# Altium PCB UltraZohm_Digital_Template.PcbDoc
Units mm, origin at the board's own origin, x right, y up, seen from the top; angles counter-clockwise.
Board outline 155.99 x 100 mm, 4 copper layers (Top Layer, Layer 1, Layer 2, Bottom Layer), stack 0.98 mm thick; 9 components, 52 nets, 104 pads, 0 vias.
Unrouted connection lines stored in the file: 165.
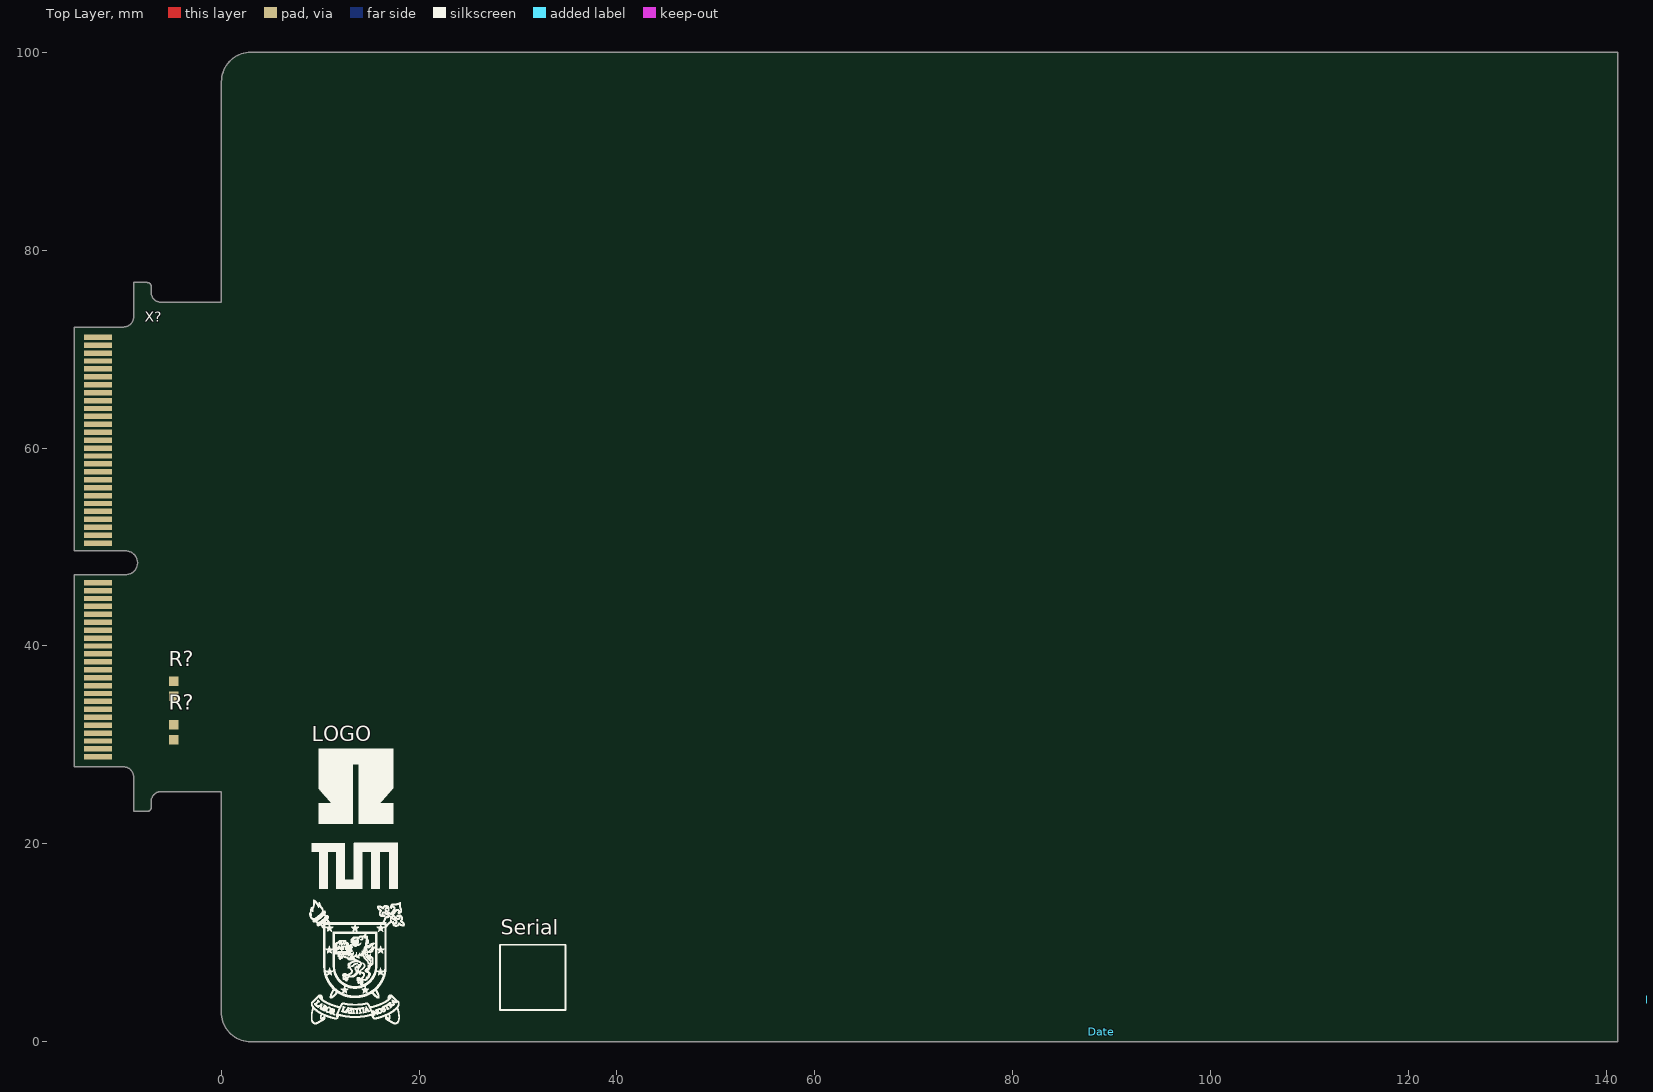
[diagram p0: Top Layer view]
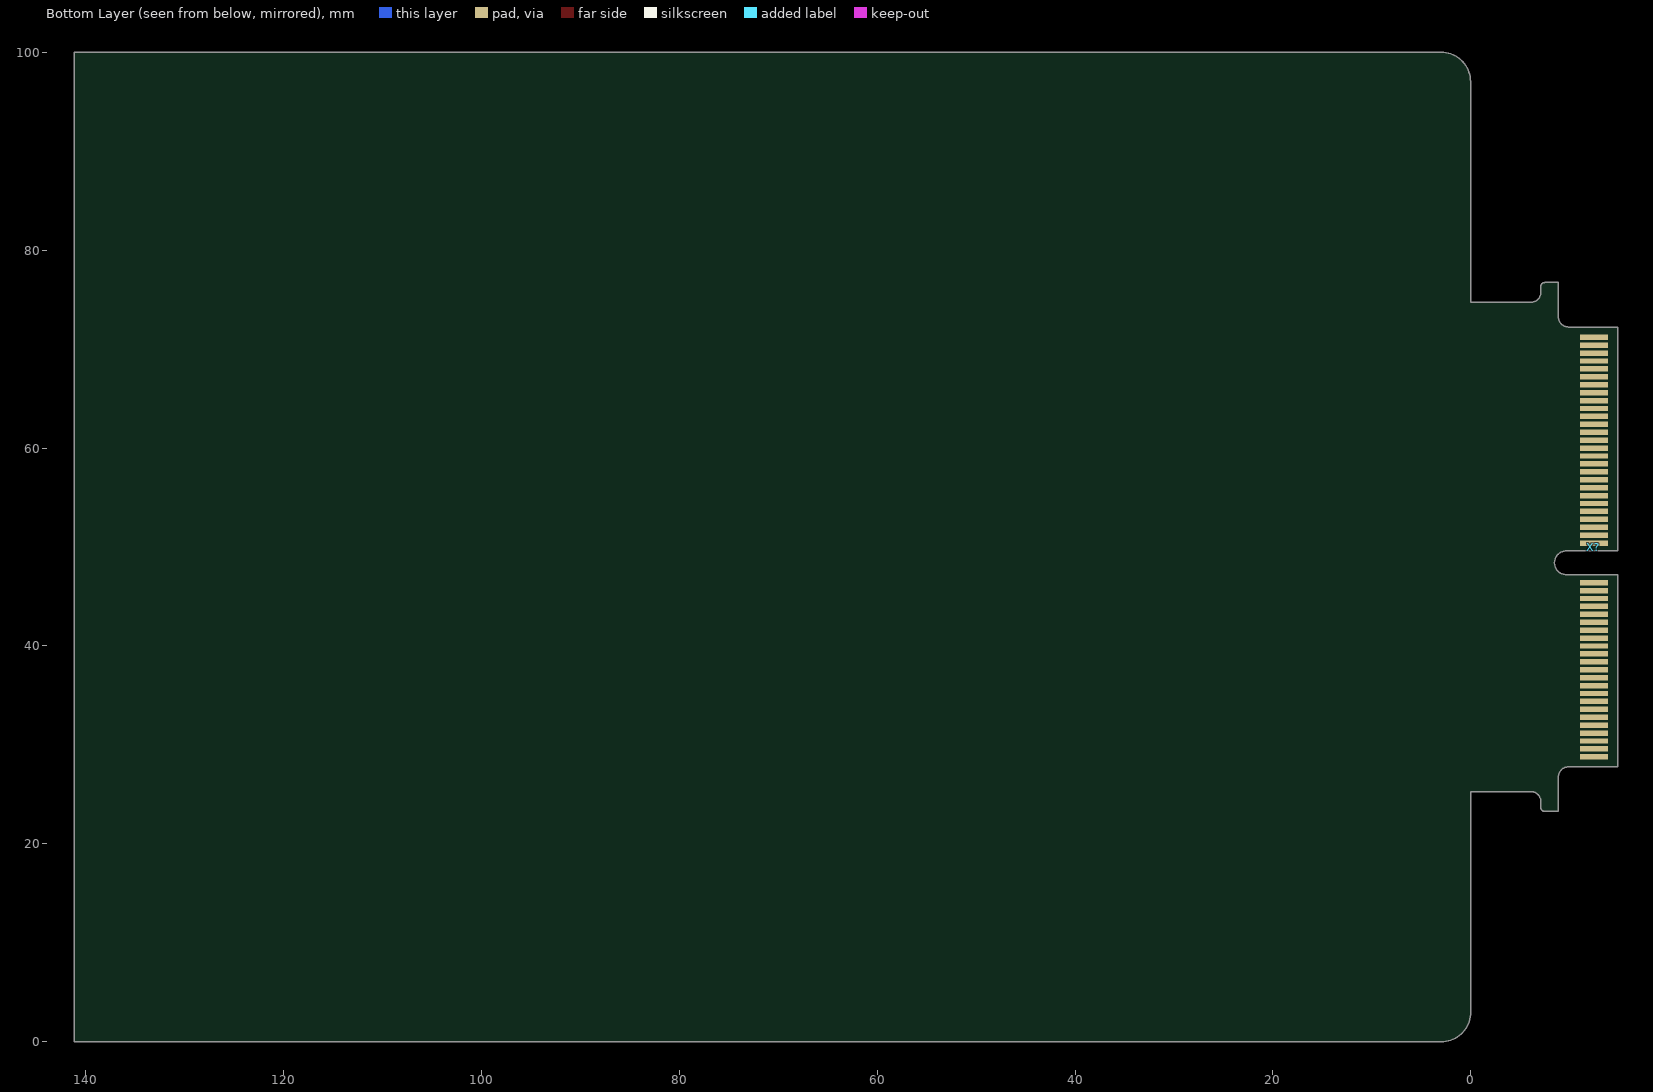
[diagram p1: Bottom Layer view, seen from below]

## Layer stack, top to bottom
Top Solder: solder mask 0.0102, Solder Resist, Dk 3.5
Top Layer: signal copper 0.035
Dielectric 2: prepreg 0.115, FR-4, Dk 4.4
Dielectric 4: prepreg 0.115, FR-4, Dk 4.4
Layer 1: signal copper 0.035
Dielectric 1: core 0.38, Core-036, Dk 4.4
Layer 2: signal copper 0.035
Dielectric 5: prepreg 0.115, FR-4, Dk 4.4
Dielectric 3: prepreg 0.115, FR-4, Dk 4.4
Bottom Layer: signal copper 0.035
Bottom Solder: solder mask 0.0102, Solder Resist, Dk 3.5

## Board outline
-14.853,27.775 -9.853,27.775 cw(c-9.853,26.775) -8.853,26.775 -8.853,23.275 -7.473,23.275 ccw(c-7.473,23.675) -7.073,23.675 -7.073,24.275 cw(c-6.073,24.275) -6.073,25.275 0,25.275 0,3 ccw(c3,3) 3,0 141.141,0 141.141,100 2.99,99.99 ccw(c2.99,97.032) 0.031,97.031 0.031,74.725 -6.073,74.725 cw(c-6.073,75.725) -7.073,75.725 -7.073,76.325 ccw(c-7.473,76.325) -7.473,76.725 -8.853,76.725 -8.853,73.225 cw(c-9.853,73.225) -9.853,72.225 -14.853,72.225 -14.853,49.6 -9.653,49.6 cw(c-9.653,48.4) -9.653,47.2 -14.853,47.2

## Design rules (kind name [scope] priority, off if disabled: settings)
AssemblyTestPointUsage [InNetClass('3V3_SingleEnded') or InNetClass('5V_SingleEnded') or InNetClass('15V_SingleEnded') or InNetClass('DifferentialSignals')] p1:
Clearance Clearance_Differential [InNetClass('DifferentialSignals')] p1: gap=0.1 ignorepadtopadclearanceinfootprint=TRUE except(0: Arc-Hole Track-Hole SMDPad-Hole THPad-Hole Via-Hole Fill-Hole Poly-Hole Region-Hole Text-Hole; 0.3: SMDPad-Via; 0.4: THPad-Via)
Clearance Clearance_Power [InNetClass('Power')] p2: gap=0.1 ignorepadtopadclearanceinfootprint=TRUE except(0: Arc-Hole Track-Hole SMDPad-Hole THPad-Hole Via-Hole Fill-Hole Poly-Hole Region-Hole Text-Hole; 0.15: Via-Poly; 0.2: Track-Poly; 0.25: THPad-Poly; 0.3: Fill-Poly Poly-Region; 0.5: Poly-Poly)
Clearance [All] p3: gap=0.1 ignorepadtopadclearanceinfootprint=TRUE except(0: Arc-Hole Track-Hole SMDPad-Hole THPad-Hole Via-Hole Fill-Hole Poly-Hole Region-Hole Text-Hole; 0.4: SMDPad-Via THPad-Via; 0.5: Poly-Poly)
ComponentClearance [All] p1: gap=0.1 collisioncheckmode=3 verticalgap=0.1 showdistances=FALSE
DiffPairsRouting [InNetClass('DifferentialSignals')] p1: maxlimit=0.25 minlimit=0.127 mostfreqgap=0.25 toplayer_maxgap=0.127 toplayer_prefgap=0.127 toplayer_minwidth=0.285 toplayer_maxwidth=0.285 toplayer_prefwidth=0.285 midlayer1_minwidth=0.069 midlayer1_maxwidth=0.15 midlayer1_prefwidth=0.15 midlayer2_mingap=0.165 midlayer2_minwidth=0.1 midlayer2_maxwidth=0.15 midlayer2_prefwidth=0.15 bottomlayer_maxgap=0.127 bottomlayer_prefgap=0.127 bottomlayer_minwidth=0.285 bottomlayer_maxwidth=0.285 bottomlayer_prefwidth=0.285 impedanceprofiledriven=TRUE impedanceprofileid={5F7DE71B-7B0B-4CDE-8AE7-8AD61221F3A5} impedanceprofilevalue=100.000000 maxuncoupledlength=12.7
FanoutControl Fanout_Power [InNetClass('Power') or InNet('ENABLE')] p1: bgadir=Out bgaviamode=Centered fanoutstyle=Auto fanoutdirection=None viagrid=0.025
FanoutControl Fanout_RS422 [InNetClass('DifferentialSignals')] p2: bgadir=Out bgaviamode=Closest fanoutstyle=Rows fanoutdirection=OutOnly viagrid=0.025
FanoutControl Fanout_BGA [IsBGA] p3 off: bgadir=Out bgaviamode=Centered fanoutstyle=Auto fanoutdirection=Alternating viagrid=0.025 // Fanout_BGA (Default Rule)
FanoutControl Fanout_LCC [IsLCC] p4 off: bgadir=Out bgaviamode=Centered fanoutstyle=Auto fanoutdirection=Alternating viagrid=0.025 // Fanout_LCC (Default Rule)
FanoutControl Fanout_SOIC [IsSOIC] p5 off: bgadir=Out bgaviamode=Centered fanoutstyle=Auto fanoutdirection=Alternating viagrid=0.025 // Fanout_SOIC (Default Rule)
FanoutControl Fanout_Small [(CompPinCount < 5)] p6 off: bgadir=Out bgaviamode=Centered fanoutstyle=Auto fanoutdirection=OutThenIn viagrid=0.025 // Fanout_Small (Default Rule)
FanoutControl Fanout_Default [All] p7: bgadir=NE bgaviamode=Closest fanoutstyle=Rows fanoutdirection=InOnly viagrid=0.025 // Fanout_Default (Default Rule)
Height [All] p1: minheight=0 maxheight=50 prefheight=12.7
HoleSize [All] p1: absolutevalues=TRUE maxlimit=4 minlimit=0.025 maxpercent=80.000 minpercent=20.000
PolygonConnect PolygonConnect_Therm [HoleSize > 2.6] p1: connectstyle=Direct reliefconductorwidth=0.254 reliefentries=4 polygonreliefangle="90 Angle" airgapwidth=0.254
PolygonConnect PolygonConnect_via [InPadClass('pad') or IsVia] p2: connectstyle=Direct reliefconductorwidth=0.254 reliefentries=4 polygonreliefangle="90 Angle" airgapwidth=0.254
PolygonConnect [All] p3: connectstyle=Relief reliefconductorwidth=0.3 reliefentries=4 polygonreliefangle="90 Angle" airgapwidth=0.25
RoomDefinition X1 [InComponentClass('X1')] p1: confinementstyle=ConfineIn formatcopy=TRUE lockcomponents=FALSE outline -19.05,21.59 3.81,21.59 3.81,79.756 -19.05,79.756
RoutingLayers RoutingLayers_3V3Signals [InNetClass('3V3_SingleEnded')] p1 off: top layer_v5=TRUE mid layer 1_v5=TRUE mid layer 2_v5=TRUE bottom layer_v5=TRUE
RoutingLayers RoutingLayers_SingleEnded [InNetClass('15V_SingleEnded') or InNetClass('3V3_SingleEnded') or InNetClass('5V_SingleEnded')] p2 off: top layer_v5=TRUE mid layer 1_v5=TRUE mid layer 2_v5=TRUE bottom layer_v5=TRUE
RoutingLayers RoutingLayers_Differential [InNetClass('DifferentialSignals')] p3 off: top layer_v5=TRUE mid layer 1_v5=TRUE mid layer 2_v5=TRUE bottom layer_v5=FALSE
RoutingLayers [All] p4: top layer_v5=TRUE mid layer 1_v5=TRUE mid layer 2_v5=TRUE bottom layer_v5=TRUE
RoutingVias [All] p1: holewidth=0.3 width=0.5 viastyle="Through Hole" minholewidth=0.2 minwidth=0.4 maxholewidth=0.5 maxwidth=1
SolderMaskExpansion [All] p1: expansion=0.102
UnRoutedNet UnRoutedNet_Signals [InNetClass('15V_SingleEnded') or InNetClass('3V3_SingleEnded') or InNetClass('5V_SingleEnded') or InNetClass('DifferentialSignals')] p1: checkbadconnections=TRUE
UnRoutedNet [All] p2: checkbadconnections=TRUE
Width Width_Power [InNetClass('Power')] p1: maxlimit=10 minlimit=0.2 preferedwidth=0.3 minimp=50.000000 maximp=50.000000 favimp=50.000000
Width [All] p2: maxlimit=10 minlimit=0.1 preferedwidth=0.3 midlayer1_prefwidth=0.15 midlayer2_prefwidth=0.15 minimp=50.000000 maximp=50.000000 favimp=50.000000
18 further rules are at their usual default settings.

## Classes and differential pairs
component class X1: R? X?

## Components (designator, comment, footprint, x,y, rotation, side; value= is the part's Value field where it differs from the comment)
Date "2020/01" Comment 89,1 r0 top
Designer "T. Wendt" Designator:comment 146.479,4.247 r90 top
LOGO "Logo_THN_TUM_USACH" Logo_Partners_1 13.6,25.5 r0 top
Project "UltraZohm_DigitalVoltage" Designator:comment 146.479,4.247 r90 top
R? "R_TF" RESC1608X55X30NL15T15 -4.8,35.675 r90 top value=0
R? "R_TF" RESC1608X55X30NL15T15 -4.8,31.275 r90 top value=0
Revision "1v00" Designator:comment 159.379,4.747 r90 top
Serial "Serial #" SERIAL 30.2,8.6 r0 top
X? "HSEC8-150-01-XX-DV-A-BL-CARD" HSEC8-150-01-XX-DV-A-BL-CARD -14.84,49.991 r270 bottom

## Footprints (in the part's own frame and the unit in brackets; to place one, negate y for a bottom-side part, rotate by r counter-clockwise, add the part's x,y. Pads: shape width x height; smd on the part's side, far side on the other; paste and mask are expansions set on the pad)
Comment [mm] "Displays only the comment of the PCB component"
Designator:comment [mm] "prints out designator and comment of a component"
HSEC8-150-01-XX-DV-A-BL-CARD [mm]
  rect 0.55x2.8 smd far side mask+0.05: 1(-21.2,-2.4) 3(-20.4,-2.4) 5(-19.6,-2.4) 7(-18.8,-2.4) 9(-18,-2.4) 11(-17.2,-2.4) 13(-16.4,-2.4) 15(-15.6,-2.4) 17(-14.8,-2.4) 19(-14,-2.4) 21(-13.2,-2.4) 23(-12.4,-2.4) 25(-11.6,-2.4) 27(-10.8,-2.4) 29(-10,-2.4) 31(-9.2,-2.4) 33(-8.4,-2.4) 35(-7.6,-2.4) 37(-6.8,-2.4) 39(-6,-2.4) 41(-5.2,-2.4) 43(-4.4,-2.4) 45(-3.6,-2.4) 47(-2.8,-2.4) 49(-2,-2.4) 51(-1.2,-2.4) 53(-0.4,-2.4) 55(3.6,-2.4) 57(4.4,-2.4) 59(5.2,-2.4) 61(6,-2.4) 63(6.8,-2.4) 65(7.6,-2.4) 67(8.4,-2.4) 69(9.2,-2.4) 71(10,-2.4) 73(10.8,-2.4) 75(11.6,-2.4) 77(12.4,-2.4) 79(13.2,-2.4) 81(14,-2.4) 83(14.8,-2.4) 85(15.6,-2.4) 87(16.4,-2.4) 89(17.2,-2.4) 91(18,-2.4) 93(18.8,-2.4) 95(19.6,-2.4) 97(20.4,-2.4) 99(21.2,-2.4)
  rect 0.55x2.8 smd mask+0.05: 2(-21.2,-2.4) 4(-20.4,-2.4) 6(-19.6,-2.4) 8(-18.8,-2.4) 10(-18,-2.4) 12(-17.2,-2.4) 14(-16.4,-2.4) 16(-15.6,-2.4) 18(-14.8,-2.4) 20(-14,-2.4) 22(-13.2,-2.4) 24(-12.4,-2.4) 26(-11.6,-2.4) 28(-10.8,-2.4) 30(-10,-2.4) 32(-9.2,-2.4) 34(-8.4,-2.4) 36(-7.6,-2.4) 38(-6.8,-2.4) 40(-6,-2.4) 42(-5.2,-2.4) 44(-4.4,-2.4) 46(-3.6,-2.4) 48(-2.8,-2.4) 50(-2,-2.4) 52(-1.2,-2.4) 54(-0.4,-2.4) 56(3.6,-2.4) 58(4.4,-2.4) 60(5.2,-2.4) 62(6,-2.4) 64(6.8,-2.4) 66(7.6,-2.4) 68(8.4,-2.4) 70(9.2,-2.4) 72(10,-2.4) 74(10.8,-2.4) 76(11.6,-2.4) 78(12.4,-2.4) 80(13.2,-2.4) 82(14,-2.4) 84(14.8,-2.4) 86(15.6,-2.4) 88(16.4,-2.4) 90(17.2,-2.4) 92(18,-2.4) 94(18.8,-2.4) 96(19.6,-2.4) 98(20.4,-2.4) 100(21.2,-2.4)
Logo_Partners_1 [mm] "THN, TUM and USACH Logo"
  silkscreen extent -4.69,-23.68 4.93,4.11
RESC1608X55X30NL15T15 [mm] "Chip Resistor, 2-Leads, Body 1.75x0.95mm, IPC Medium Density"
  rect 0.95x0.95 smd: 1(-0.75,0) 2(0.75,0)
  body extent -0.87,-0.48 0.87,0.48, height 0.55
SERIAL [mm]
  silkscreen extent -2,-5.4 4.6,1.2

## Part data
Date: library part ProjectDate, "Year and month of the design finish", created=2020-01-08_Thilo_Wendt
Designer: library part ProjectAuthor, created=2020-01-08_Thilo_Wendt
LOGO: "Logo of THN TUM USACH", created=2020-01-08_Thilo_Wendt
Project: library part ProjectName, created=2020-01-08_Thilo_Wendt
R? R?: library part R_0.1W_SMD, "Standard thick film resistor", MaxVoltage=100, MPN=ERJU030R00V, Package=CurrentFootprint, Supplier Part Number 1=667-ERJ-U030R00V, ComponentLink1Description=Datasheet, ComponentLink1URL=https://www.mouser.de/datasheet/2/315/AOA0000C334-1314047.pdf, created=2019-12-08_Thilo_Wendt, HelpURL=https://www.mouser.de/datasheet/2/315/AOA0000C334-1314047.pdf, MF=Panasonic, Parameter1=V, Parameter1Desc="Package Method", Parameter2=F, Parameter2Desc="Tolerance Symbol", Supplier 1=Mouser
Revision: library part ProjectRevision, created=2020-01-08_Thilo_Wendt
Serial: library part SerialNumber, "Empty serial number of the PCB. Can be used for manually writing the serial number"
X?: "Mating Card Layout for HSEC8-150-01-XX-DV-A-BL", Manufacturer=SAMTEC, created=2018_04_23_AGeiger

## Nets (pads, with @x,y where several pads share a name; then routed paths per layer and width w, separated by ;. In a path a pad name is that pad's centre, name@x,y a point inside that pad or via, vN(x,y) a via of type N, cw(c..) or ccw(c..) an arc to the next point about the centre after c; other vN are vias at no path point)
3V3_PER: X?.13 X?.14
5V_PER: X?.9 X?.10
Collective_FLT: X?.96
CPLD_DigIn_01: X?.83
CPLD_DigIn_02: X?.85
CPLD_DigOut_01: X?.84
CPLD_DigOut_02: X?.86
DIG_IO_01: X?.17
DIG_IO_02: X?.18
DIG_IO_03: X?.21
DIG_IO_04: X?.22
DIG_IO_05: X?.25
DIG_IO_06: X?.26
DIG_IO_07: X?.29
DIG_IO_08: X?.30
DIG_IO_09: X?.33
DIG_IO_10: X?.34
DIG_IO_11: X?.37
DIG_IO_12: X?.38
DIG_IO_13: X?.41
DIG_IO_14: X?.42
DIG_IO_15: X?.45
DIG_IO_16: X?.46
DIG_IO_17: X?.49
DIG_IO_18: X?.50
DIG_IO_19: X?.53
DIG_IO_20: X?.54
DIG_IO_21: X?.57
DIG_IO_22: X?.58
DIG_IO_23: X?.61
DIG_IO_24: X?.62
DIG_IO_25: X?.65
DIG_IO_26: X?.66
DIG_IO_27: X?.69
DIG_IO_28: X?.70
DIG_IO_29: X?.73
DIG_IO_30: X?.74
DIG_Res_01: X?.79
DIG_Res_02: X?.80
DIG_Res_03: X?.91
DIG_Res_04: X?.92
DIG_Res_05: X?.93
DIG_Res_06: X?.94
DIG_Res_07: X?.95
GND: R?.1@-4.8,30.525 X?.1 X?.2 X?.3 X?.4 X?.7 X?.8 X?.11 X?.12 X?.15 X?.16 X?.19 X?.20 X?.23 X?.24 X?.27 X?.28 X?.31 X?.32 X?.35 X?.36 X?.39 X?.40 X?.43 X?.44 X?.47 X?.48 X?.51 X?.52 X?.55 X?.56 X?.59 X?.60 X?.63 X?.64 X?.67 X?.68 X?.71 X?.72 X?.75 X?.76 X?.81 X?.82 X?.87 X?.88 X?.97 X?.98
I2C0_SCA: X?.90
I2C0_SCL: X?.89
PILOT_IN: R?.2@-4.8,36.425 X?.100
PILOT_OUT: R?.1@-4.8,34.925 R?.2@-4.8,32.025 X?.99
PS_DIG_GPIO_01: X?.77
PS_DIG_GPIO_02: X?.78
VIN: X?.5 X?.6

## Silkscreen, mask and mechanical layers (free items; w line width, h text height)
Mechanical 1:
  lines w0.254: -9.853,27.775 cw(c-9.853,26.775) -8.853,26.775 ; -9.853,72.225 ccw(c-9.853,73.225) -8.853,73.225 ; -9.64,47.191 ccw(c-9.64,48.391) -9.64,49.591 ; -7.473,23.275 ccw(c-7.473,23.675) -7.073,23.675 ; -7.473,76.725 cw(c-7.473,76.325) -7.073,76.325 ; -7.073,24.275 cw(c-6.073,24.275) -6.073,25.275 ; -7.073,75.725 ccw(c-6.073,75.725) -6.073,74.725 ; 0,2.9 ccw(c2.9,2.9) 2.9,0 ; 0.031,97.1 cw(c2.966,97.066) 3,100

## Dimensions
141.141,0 to 141.141,100 on Mechanical 2
146.143,97.802 to -14.84,72.216 on Mechanical 2
141.141,100 to -14.853,72.225 on Mechanical 2
141.141,100 to 0.031,100 on Mechanical 2

## Text inside footprints (layer, text, board x,y; h text height)
Serial: Mechanical 5 "SerialNr" at 34,4.8 h0.7 r180